# Altium PCB PCB1.PcbDoc
Units mil, origin at the board's own origin, x right, y up, seen from the top; angles counter-clockwise.
Board outline 2300.68 x 1773.62 mil, 2 copper layers (Top Layer, Bottom Layer); 18 components, 15 nets, 55 pads, 9 vias.
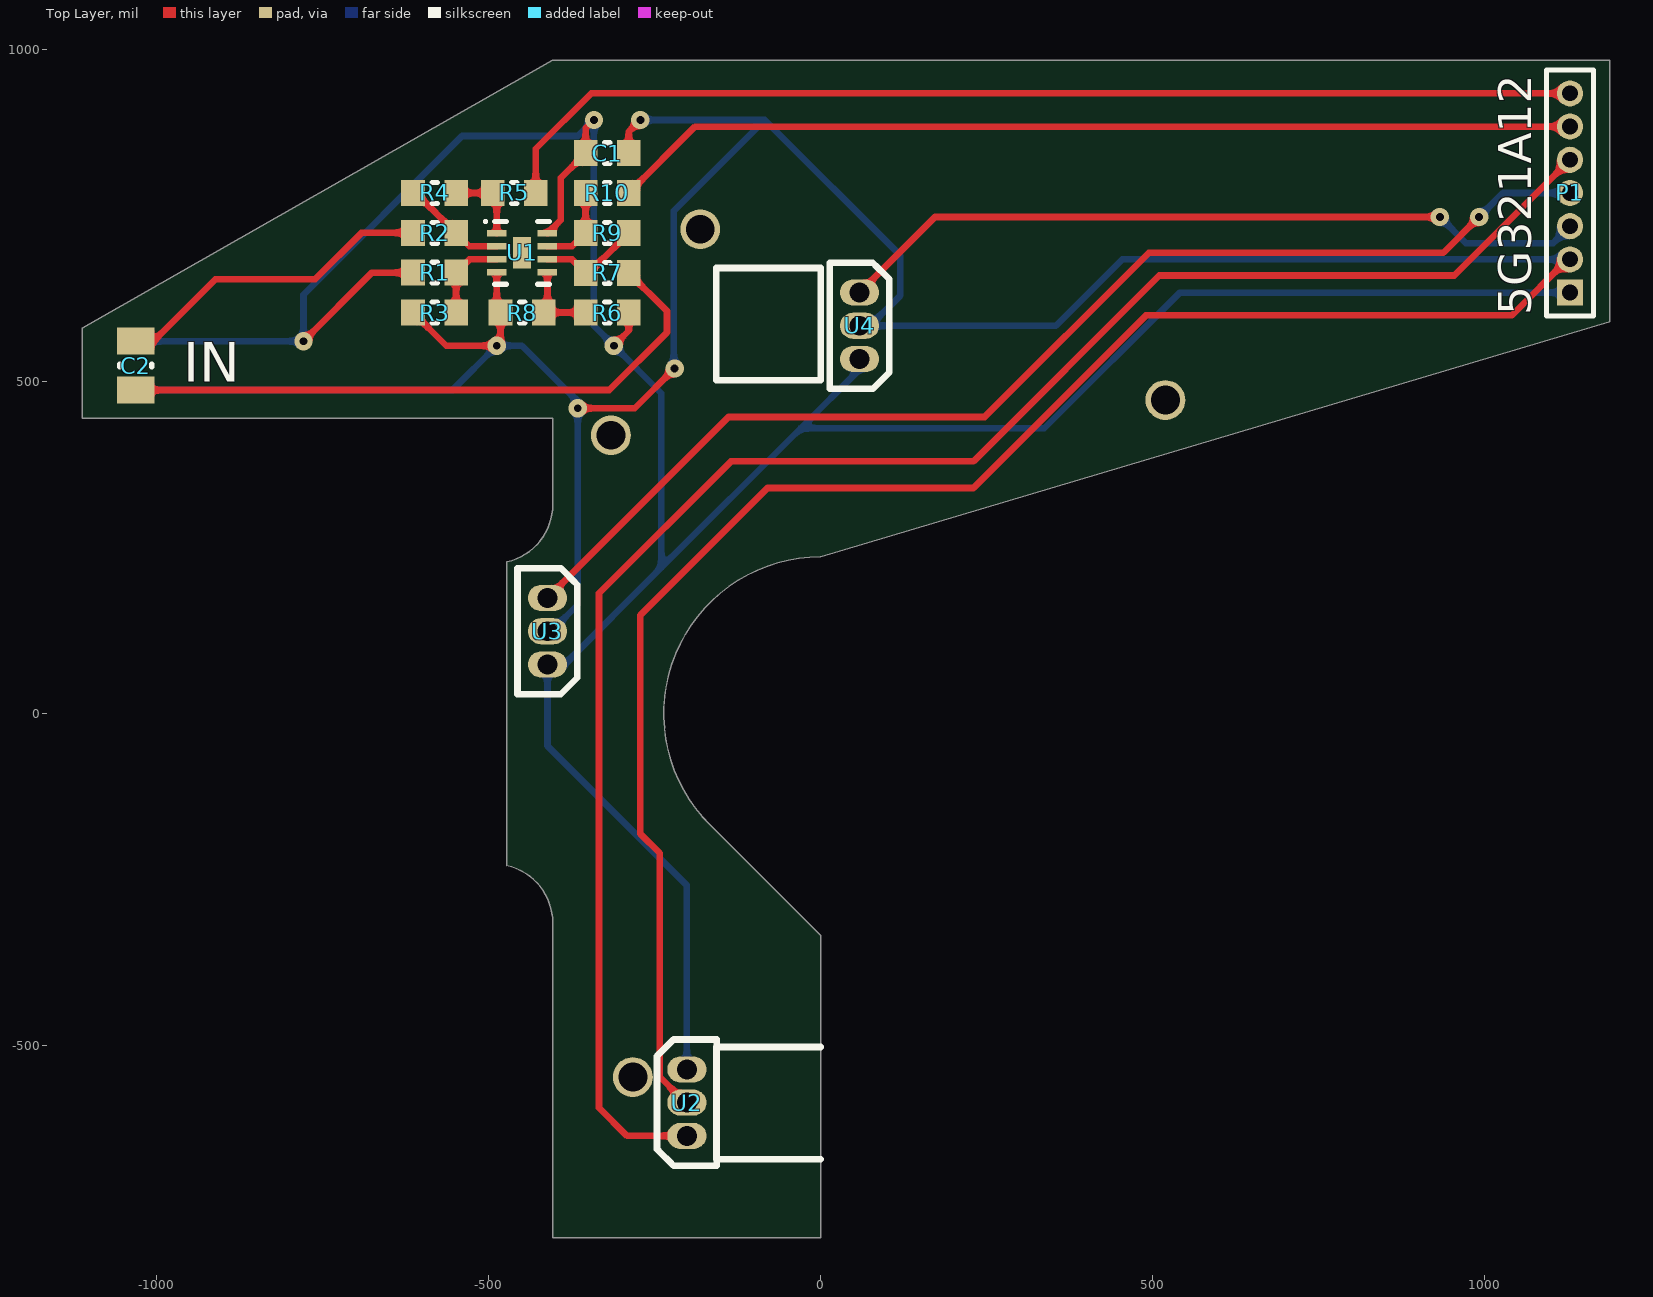
[diagram p0: Top Layer view]
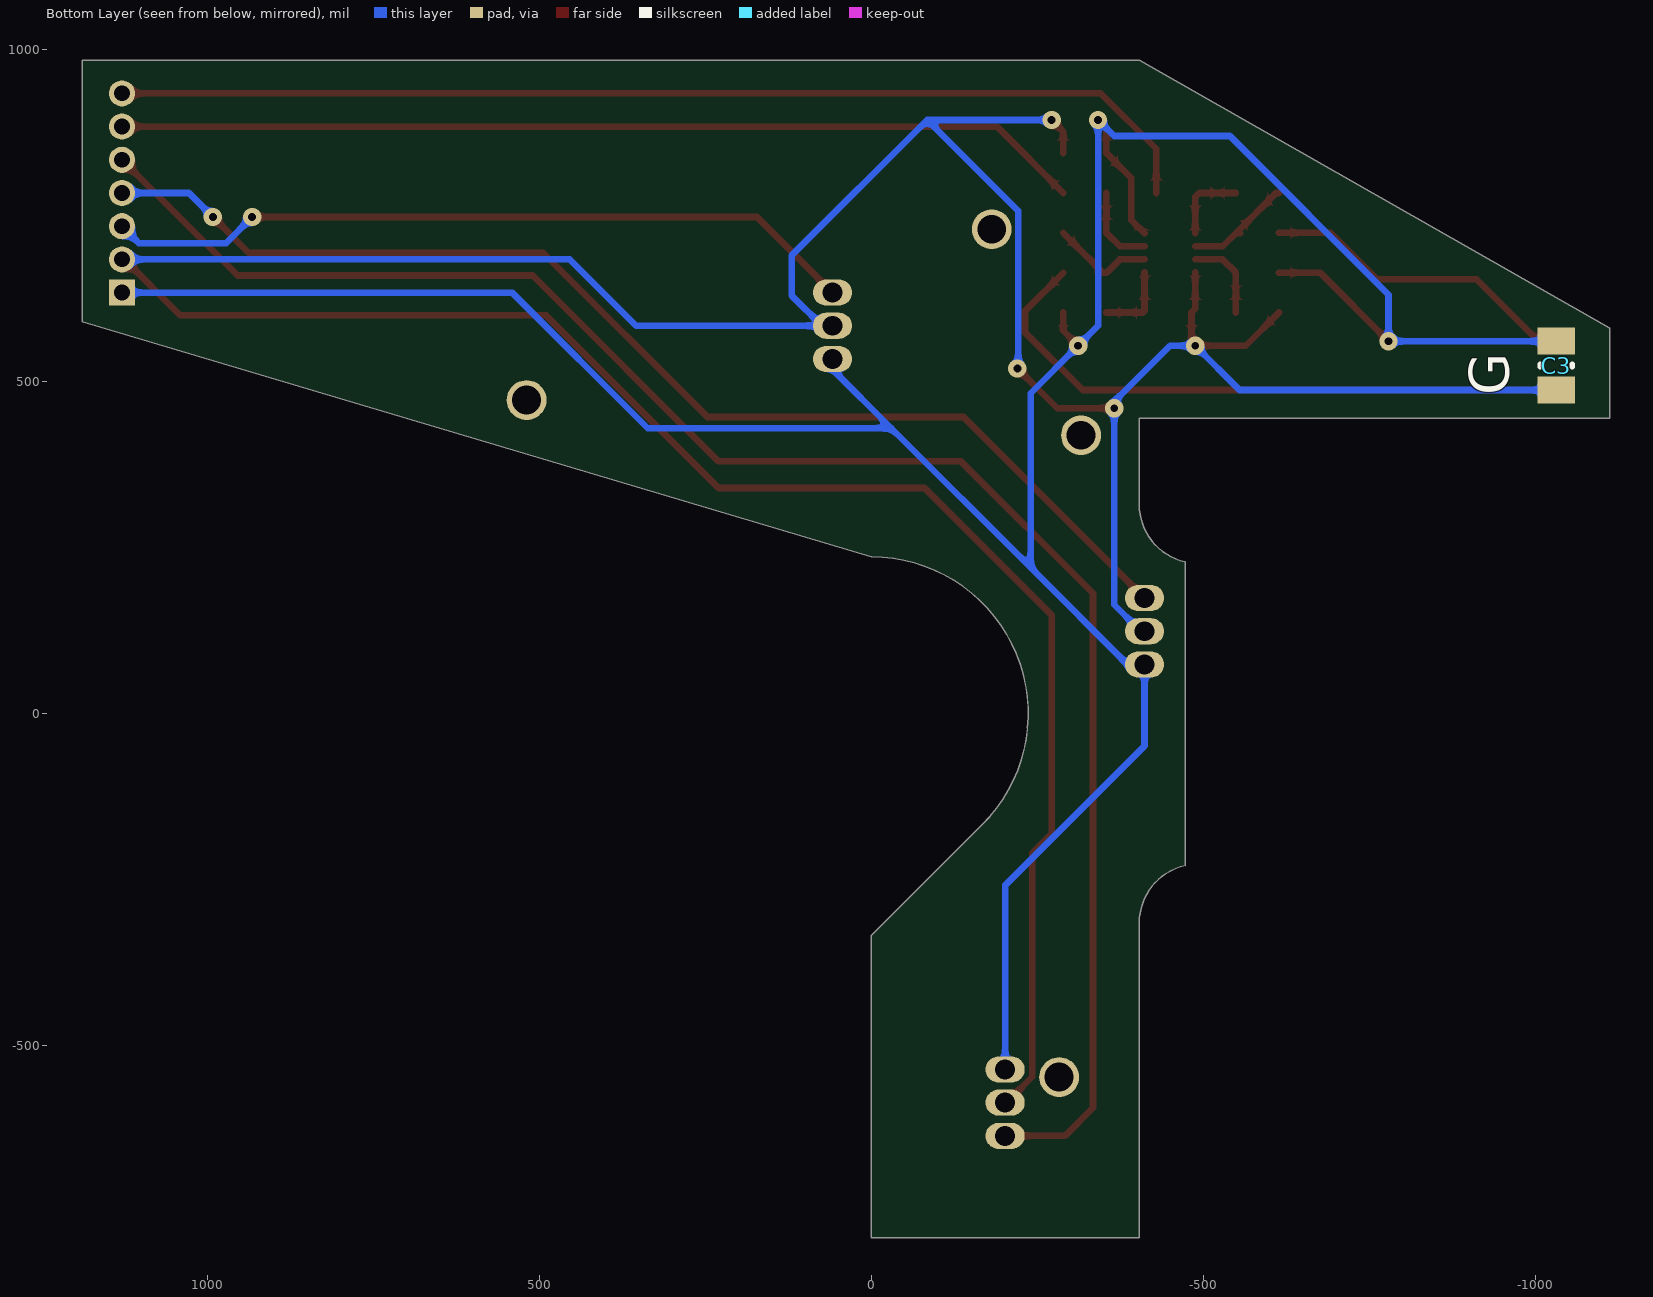
[diagram p1: Bottom Layer view, seen from below]

## Layer stack, top to bottom
Top Solder: solder mask 0.4, Solder Resist, Dk 3.5
Top Layer: signal copper 1.4
Dielectric 1: dielectric 12.6, FR-4, Dk 4.8
Bottom Layer: signal copper 1.4
Bottom Solder: solder mask 0.4, Solder Resist, Dk 3.5

## Board outline
-472.44,-228.59 -472.44,228.59 ccw(c-492.13,314.96) -403.54,314.96 -403.54,445.13 -1112.2,445.13 -1112.2,580.32 -403.54,984.25 1188.48,984.25 1188.48,590.55 0,236.22 ccw(c0,0) -167.03,-167.03 0,-334.07 0,-789.37 -403.54,-789.37 -403.54,-314.96 ccw(c-492.13,-314.96)

## Design rules (kind name [scope] priority, off if disabled: settings)
Clearance [All] p1: gap=5 ignorepadtopadclearanceinfootprint=FALSE
PolygonConnect [All] p1: connectstyle=Relief reliefconductorwidth=10 reliefentries=4 polygonreliefangle="90 Angle" airgapwidth=10
RoutingVias [All] p1: holewidth=28 width=50 viastyle="Through Hole" minholewidth=28 minwidth=50 maxholewidth=28 maxwidth=50
SolderMaskExpansion [All] p1: expansion=4
Width [All] p1: maxlimit=10 minlimit=10 preferedwidth=10
30 further rules are at their usual default settings.

## Components (designator, comment, footprint, x,y, rotation, side; value= is the part's Value field where it differs from the comment)
C1 "100n" 0603 -321.52,844.25 r0 top
C2 "HDR" 0805 -1031.52,524.25 r90 top
C3 "HDR" 0805 -1031.52,524.25 r270 bottom
P1 "MHDR1X7" MHDR1X7 1128.48,634.25 r90 top
R1 "162k" 0603 -581.52,664.25 r0 top
R2 "100k" 0603 -581.52,724.25 r0 top
R3 "140k" 0603 -581.52,604.25 r0 top
R4 "301k" 0603 -581.52,784.25 r0 top
R5 "10k" 0603 -461.52,784.25 r0 top
R6 "162k" 0603 -321.52,604.25 r180 top
R7 "100k" 0603 -321.52,663.94 r180 top
R8 "140k" 0603 -449.71,604.25 r0 top
R9 "301k" 0603 -321.52,724.25 r180 top
R10 "10k" 0603 -321.52,784.25 r0 top
U1 "RS8522" TDFN-2x2-8L -449.71,694.09 r0 top
U2 "OH3144" TO-92S -201.52,-585.75 r270 top
U3 "OH3144" TO-92S -411.52,124.25 r90 top
U4 "OH3144" TO-92S 58.48,584.25 r90 top

## Footprints (in the part's own frame and the unit in brackets; to place one, negate y for a bottom-side part, rotate by r counter-clockwise, add the part's x,y. Pads: shape width x height; smd on the part's side, far side on the other; paste and mask are expansions set on the pad)
0603 [mm]
  rect 0.9x1 smd: 1(-0.825,0) 2(0.825,0)
  silkscreen extent -0.1,-0.4 0.1,0.4
0805 [mm]
  rect 1.03x1.43 smd: 1(-0.935,0) 2(0.935,0)
  silkscreen extent -0.05,-0.62 0.05,0.62
MHDR1X7 [mm] "Connector; Header; 7 Position"
  rect 1x1 hole 0.6: 1(0,0)
  round 1 hole 0.6: 2(1.27,0) 3(2.54,0) 4(3.81,0) 5(5.08,0) 6(6.35,0) 7(7.62,0)
  silkscreen extent -0.9,-0.9 8.52,0.9
TDFN-2x2-8L [mm] "SON, 8-Leads, Body 2.00x2.00mm, Pitch 0.50mm, Thermal Pad 1.20x0.59mm, IPC Medium Density"
  rect 0.75x0.25 smd: 1(-0.97,0.75) 2(-0.97,0.25) 3(-0.97,-0.25) 4(-0.97,-0.75) 5(0.97,-0.75) 6(0.97,-0.25) 7(0.97,0.25) 8(0.97,0.75)
  rect 0.7x1.2 smd: 9(0,0)
  silkscreen extent -1.45,-1.2 1.05,1.25, body extent -1.1,-1.05 1.1,1.05, height 0.8
TO-92S [mm]
  oval 1x1.5 hole 0.762: 1(-1.27,0) 2(0,0) 3(1.27,0)
  silkscreen extent -2.41,-1.14 2.41,1.14

## Part data
C1 C2 C3: library part Cap
P1: "Header, 7-Pin", LatestRevisionDate=17-Jul-2002, LatestRevisionNote="Re-released for DXP Platform.", Publisher="Altium Limited"
R1 R2 R3 R4 R5 R6 R7 R8 R9 R10: library part Res

## Free pads (board coordinates)
  round 60 hole 43.31: 5(-315.83,419.29) 5(-282.83,-547.23) 5(-181.33,729.75) 5(519.19,472.44)

## Via types
v1: diameter 27.56, hole 11.81, Top Layer to Bottom Layer, tented both sides, 9 vias

## Nets (pads, with @x,y where several pads share a name; then routed paths per layer and width w, separated by ;. In a path a pad name is that pad's centre, name@x,y a point inside that pad or via, vN(x,y) a via of type N, cw(c..) or ccw(c..) an arc to the next point about the centre after c; other vN are vias at no path point)
+5: C1.1 C3.1 P1.1 R1.1 R6.1 U1.8 U2.1 U3.1 U4.1 | length 4661.8
  Top Layer w10: v1(-778.94,561.06) -675.75,664.25 R1.1 ; U1.8 -391.52,743.62 -391.52,806.73 C1.1 -354,881.77 v1(-341.52,894.25) ; v1(-311.52,554.25) -289.04,576.73 R6.1
  Bottom Layer w10: C3.1 v1(-778.94,561.06) -778.94,631.06 -540,870 -365.78,870 v1(-341.52,894.25) -341.52,584.25 v1(-311.52,554.25) -240,482.73 -240,220 ; U2.1 -201.52,-258.48 -411.52,-48.48 U3.1 -385.75,74.25 -240,220 ; U4.1 58.48,518.48 -30,430 ; P1.1 540.98,634.25 336.73,430 -30,430 ; -240,220 -30,430
ADC1: P1.6 R10.2 | length 1458.9
  Top Layer w10: R10.2 -189.04,884.25 P1.6
ADC2: P1.7 R5.2 | length 1658.6
  Top Layer w10: R5.2 -429.04,850.79 -345.58,934.25 P1.7
GND: C1.2 C3.2 P1.2 R3.1 R8.1 U1.4 U2.2 U3.2 U4.2 | length 6116.2
  Top Layer w10: R3.1 -564,554.25 v1(-487.9,554.25) -482.19,559.96 R8.1 -487.9,609.96 U1.4 ; v1(-365.78,460) -280,460 v1(-220,520) ; C1.2 -289.04,876.73 v1(-271.52,894.25) ; U2.2 -203.35,-585.75 -242.45,-546.64 -242.45,-210 -271.52,-180.93 -271.52,148.48 -80,340 230,340 490,600 1040.71,600 1124.96,684.25 P1.2
  Bottom Layer w10: C3.2 -554.71,487.44 v1(-487.9,554.25) -450.03,554.25 -365.78,470 v1(-365.78,460) -365.78,164.22 -405.75,124.25 U3.2 ; v1(-271.52,894.25) -84.25,894.25 ; v1(-220,520) -221.33,521.33 -221.33,757.18 -84.25,894.25 ; U4.2 U4.2@74.25,584.25 ; P1.2 454.25,684.25 354.25,584.25 U4.2@74.25,584.25 ; -84.25,894.25 120,690 120,630 U4.2@74.25,584.25
H1: P1.5 U2.3 | length 2657.5
  Top Layer w10: U2.3 -291.52,-635.75 -333.95,-593.32 -333.95,181.32 -135.27,380 230,380 510,660 954.22,660 P1.5
H2: P1.4 U3.3 | length 1792.7
  Top Layer w10: U3.3 -138.88,446.9 246.9,446.9 494.25,694.25 937.85,694.25 v1(991.62,748.03)
  Bottom Layer w10: v1(991.62,748.03) 1027.85,784.25 P1.4
H3: P1.3 U4.3 | length 1144
  Top Layer w10: U4.3 172.25,748.03 v1(932.57,748.03)
  Bottom Layer w10: v1(932.57,748.03) 971.94,708.66 1102.88,708.66 P1.3
IN1: C2.1 R7.1 | length 949.5
  Top Layer w10: C2.1 -318.33,487.44 -231.52,574.25 -231.52,606.42 R7.1
IN2: C2.2 R2.1 | length 485.1
  Top Layer w10: C2.2 -1004.71,561.06 -911.52,654.25 -761.52,654.25 -691.52,724.25 R2.1
NetR1_2: R1.2 R3.2 U1.3 | length 129.4
  Top Layer w10: R3.2 R1.2 -529.04,684.25 U1.3
NetR2_2: R2.2 R4.1 U1.2 | length 166.2
  Top Layer w10: R4.1 -609.67,784.25 R2.2@-549.04,723.62 ; R2.2@-555.85,723.62 R2.2@-549.04,723.62 ; U1.2 -529.36,703.94 R2.2@-549.04,723.62
NetR4_2: R4.2 R5.1 U1.1 | length 118.2
  Top Layer w10: R4.2 R5.1 -487.9,778.15 U1.1
NetR6_2: R6.2 R8.2 U1.5 | length 116.4
  Top Layer w10: U1.5 -411.52,606.73 -409.04,604.25 R6.2
NetR7_2: R7.2 R9.1 U1.6 | length 155.9
  Top Layer w10: U1.6 -374.32,684.25 R7.2 -349.36,663.94 R9.1
NetR9_2: R9.2 R10.1 U1.7 | length 125.9
  Top Layer w10: U1.7 -374.32,703.94 R9.2 R10.1
pads on no net: U1.9

## Silkscreen, mask and mechanical layers (free items; w line width, h text height)
Top Overlay:
  lines w10: 0,-671.26 -157.48,-671.26 -157.48,-501.97 0,-501.97 ; -157.48,501.97 -157.48,671.26 0,671.26 0,501.97 -157.48,501.97
  text "5G321A12" at 1070,600 h50 r90
  text "IN" at -960,500 h60
Bottom Overlay:
  text "G" at -960,480 h60 r270
Mechanical 1:
  circle w10: c519.18,472.44 r21.65
  circle w10: c-315.83,419.29 r21.65
  circle w10: c-181.33,729.75 r21.65
  circle w10: c-282.83,-547.23 r21.65
  lines w10: -1112.2,445.13 -1112.2,580.32 -403.54,984.25 1188.48,984.25 1188.48,590.55 0,236.22 ccw(c0,0) -167.03,-167.03 0,-334.07 0,-789.37 -403.54,-789.37 -403.54,-314.96 ccw(c-492.13,-314.96) -472.44,-228.59 -472.44,228.59 ccw(c-492.13,314.96) -403.54,314.96 -403.54,445.13 -1112.2,445.13